# Altium PCB PCB3.PcbDoc
Units mm, origin at the board's own origin, x right, y up, seen from the top; angles counter-clockwise.
Board outline 68.96 x 84.07 mm, 2 copper layers (Top Layer, Bottom Layer); 9 components, 13 nets, 54 pads, 0 vias.
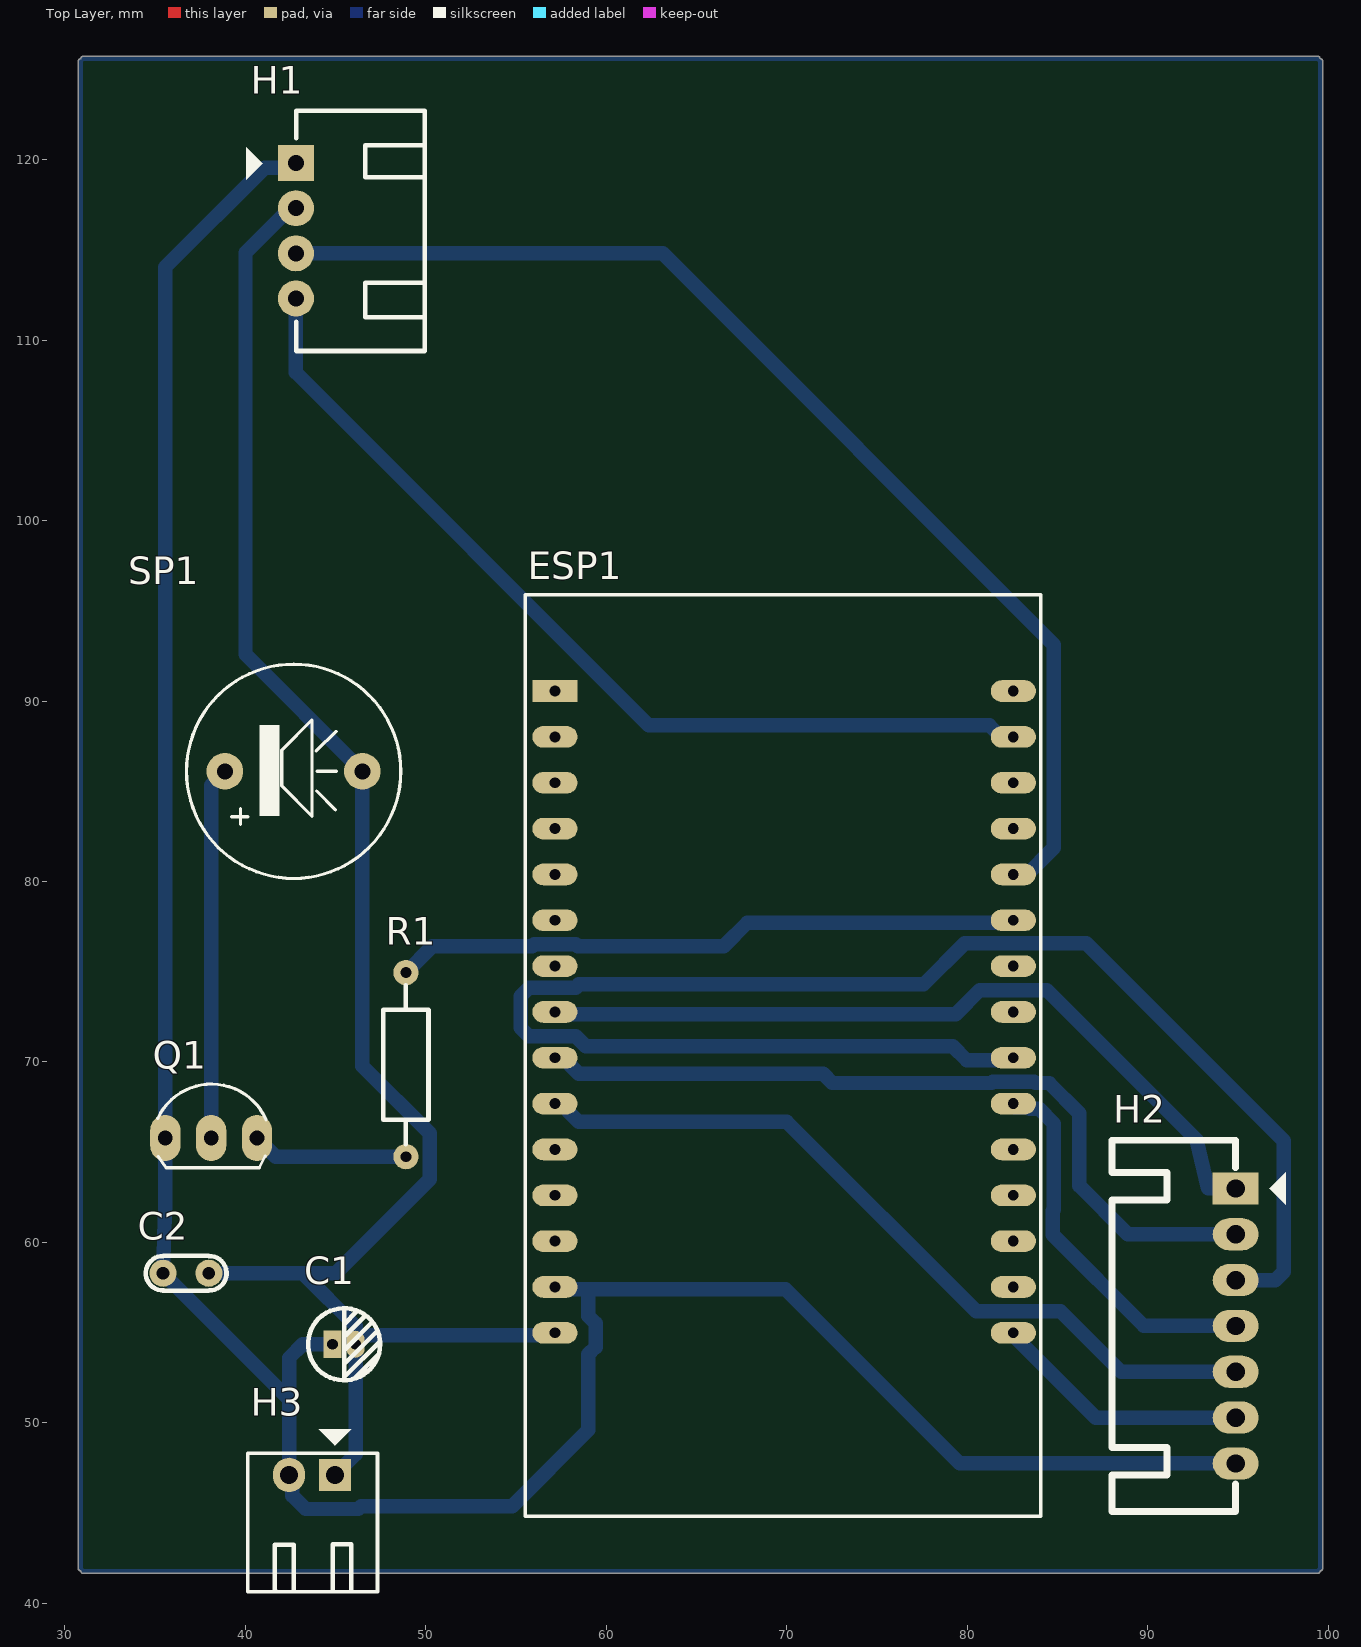
[diagram p0: Top Layer view]
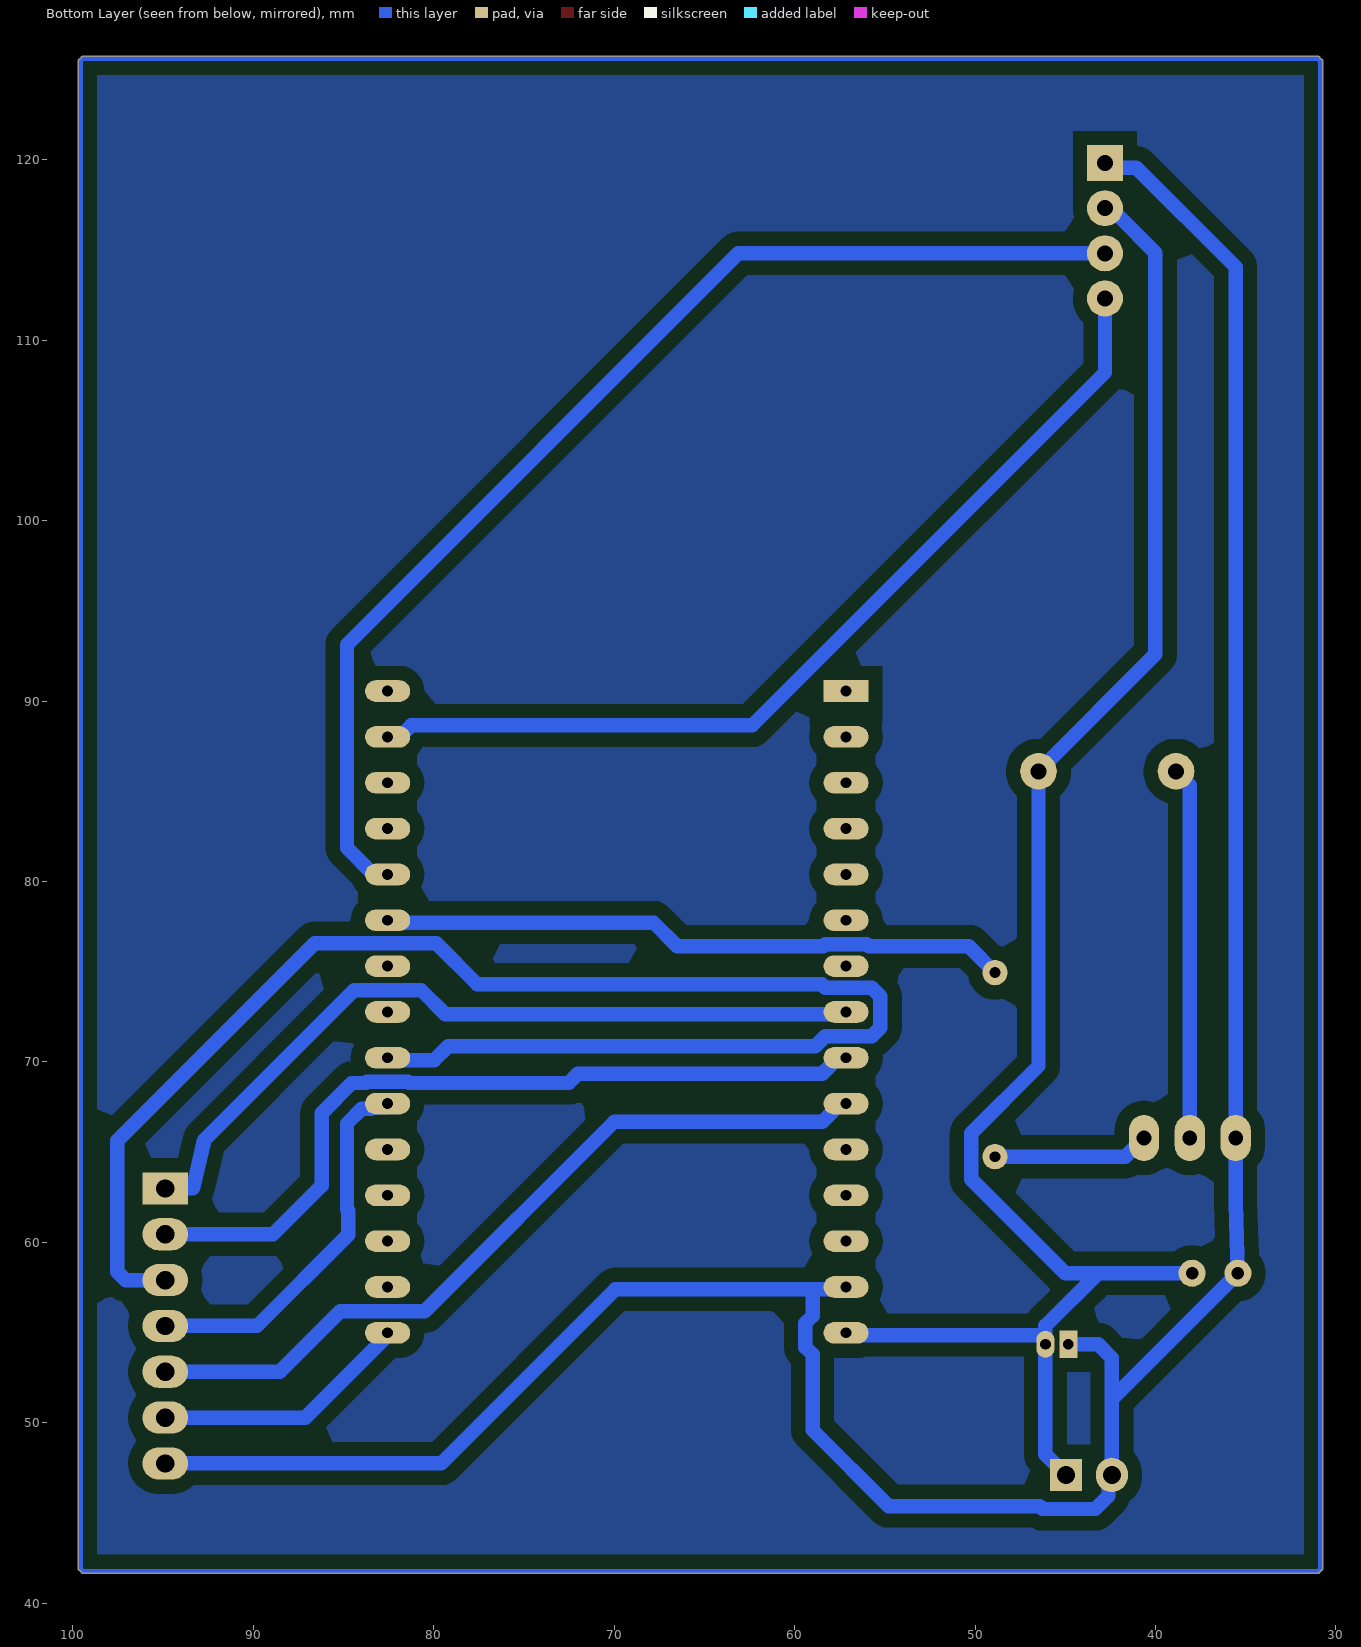
[diagram p1: Bottom Layer view, seen from below]
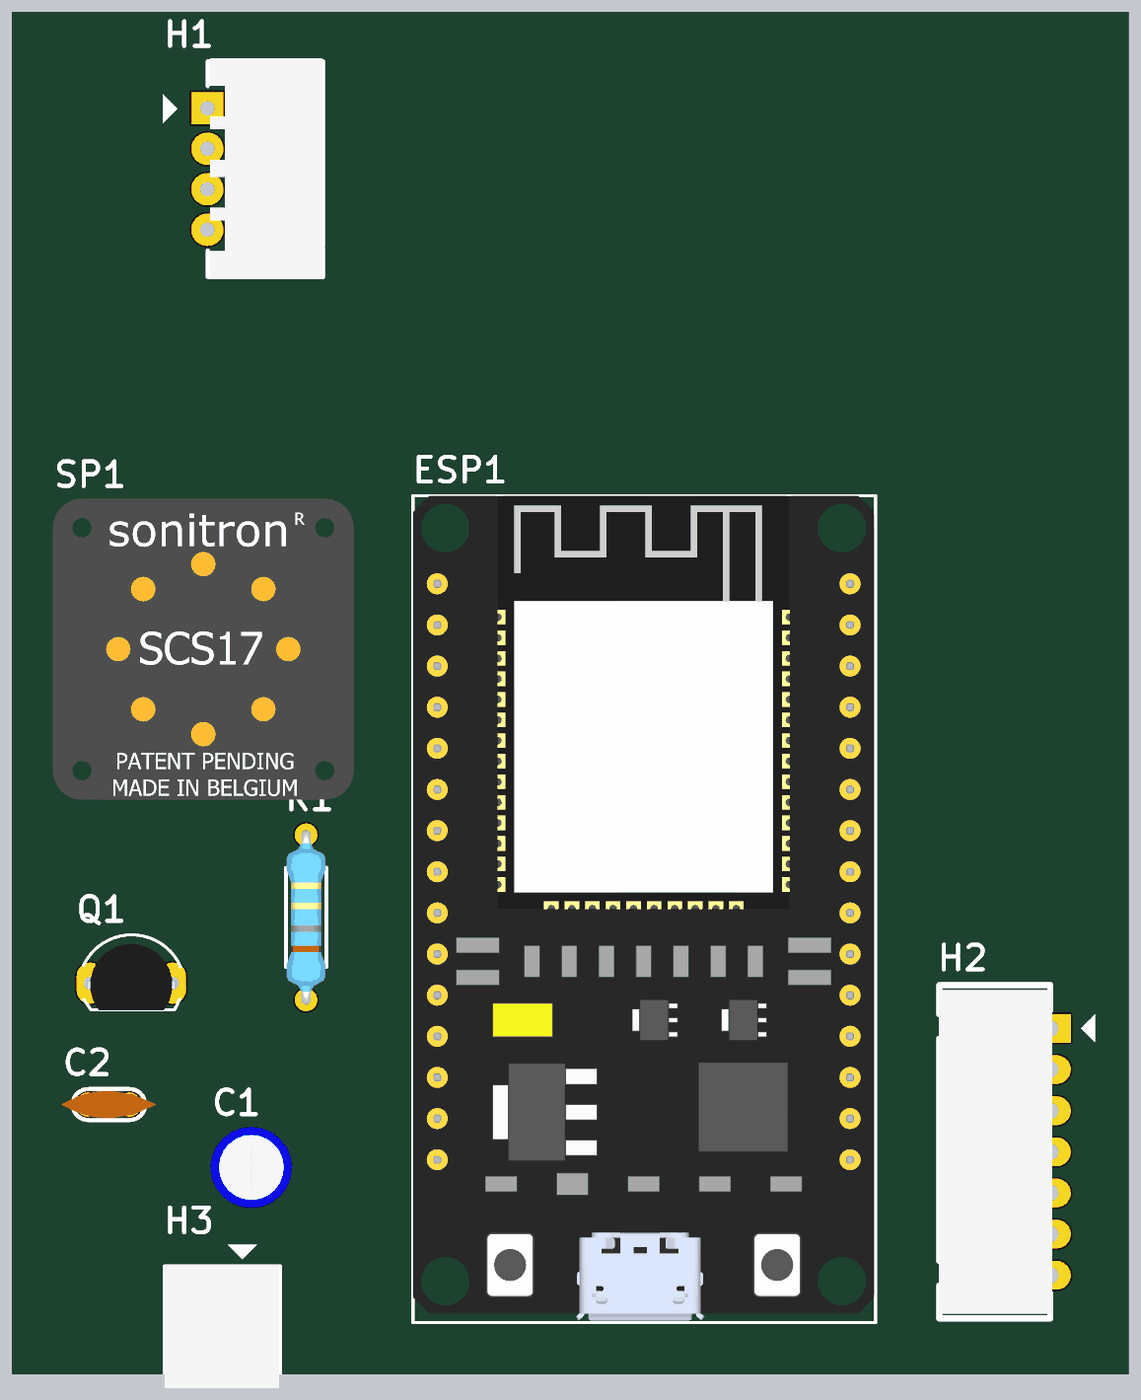
[diagram p2: 3D render of the assembled board from above, using the file's embedded part models]

## Layer stack, top to bottom
Top Solder: solder mask 0.0102, Solder Resist, Dk 3.5
Top Layer: signal copper 0.0356
Dielectric 1: dielectric 0.32, FR-4, Dk 4.8
Bottom Layer: signal copper 0.0356
Bottom Solder: solder mask 0.0102, Solder Resist, Dk 3.5

## Board outline
30.885,41.807 cw(c30.861,41.932) 30.734,41.932 30.734,125.454 cw(c30.861,125.454) 30.885,125.579 cw(c31.01,125.603) 31.01,125.73 99.419,125.73 cw(c99.419,125.603) 99.547,125.603 99.544,125.579 cw(c99.568,125.454) 99.695,125.454 99.695,41.932 cw(c99.568,41.932) 99.544,41.807 99.547,41.783 cw(c99.419,41.783) 99.419,41.656 31.01,41.656 cw(c31.01,41.783)

## Design rules (kind name [scope] priority, off if disabled: settings)
Clearance [All] p1: gap=0.8 ignorepadtopadclearanceinfootprint=FALSE
PolygonConnect [All] p1: connectstyle=Relief reliefconductorwidth=0.254 reliefentries=4 polygonreliefangle="90 Angle" airgapwidth=0.254
RoutingLayers [All] p1: top layer_v5=FALSE bottom layer_v5=TRUE
RoutingVias [All] p1: holewidth=0.711 width=1.27 viastyle="Through Hole" minholewidth=0.711 minwidth=1.27 maxholewidth=0.711 maxwidth=1.27
SolderMaskExpansion [All] p1: expansion=0.102 istentingtop=FALSE
SupplyNets "Schematic Supply Nets_2" [InNet('VCC')] p1: voltage=0.000
SupplyNets "Schematic Supply Nets_1" [InNet('GND')] p2: voltage=0.000
SupplyNets "Schematic Supply Nets" [InNet('+5')] p3: voltage=0.000
Width [All] p1: maxlimit=0.8 minlimit=0.8 preferedwidth=0.8
29 further rules are at their usual default settings.

## Components (designator, comment, footprint, x,y, rotation, side; value= is the part's Value field where it differs from the comment)
C1 "22uF" "tu hoa 4mm" 45.466,54.356 r0 top
C2 "104" "tu gom" 36.703,58.293 r180 top
ESP1 "ESP32 DEVKIT" "ESP32 WROOM 32 KIT" 57.15,90.551 r0 top
H1 "LCD 16x2" "Header 4P DC 2.54" 42.824,119.783 r0 top
H2 "LoRa Module" "Header 7P DC 2.54" 94.869,62.993 r180 top
H3 "Nguồn" "Header 2P DC 2.54" 44.958,47.117 r270 top
Q1 "C1815" TO92 38.1,65.786 r0 top value=C9014
R1 "330R" "tro vach 1/4w" 48.895,69.85 r270 top
SP1 "Speaker" SPK 38.862,86.106 r0 top value="Speaker Chip"

## Footprints (in the part's own frame and the unit in brackets; to place one, negate y for a bottom-side part, rotate by r counter-clockwise, add the part's x,y. Pads: shape width x height; smd on the part's side, far side on the other; paste and mask are expansions set on the pad)
"ESP32 WROOM 32 KIT" [mm]
  rect 2.5x1.2 hole 0.6: 1(0,0)
  oval 2.5x1.2 hole 0.6: 2(0,-2.54) 3(0,-5.08) 4(0,-7.62) 5(0,-10.16) 6(0,-12.7) 7(0,-15.24) 8(0,-17.78) 9(0,-20.32) 10(0,-22.86) 11(0,-25.4) 12(0,-27.94) 13(0,-30.48) 14(0,-33.02) 15(0,-35.56) 16(25.4,-35.56) 17(25.4,-33.02) 18(25.4,-30.48) 19(25.4,-27.94) 20(25.4,-25.4) 21(25.4,-22.86) 22(25.4,-20.32) 23(25.4,-17.78) 24(25.4,-15.24) 25(25.4,-12.7) 26(25.4,-10.16) 27(25.4,-7.62) 28(25.4,-5.08) 29(25.4,-2.54) 30(25.4,0)
  silkscreen extent -1.65,-45.72 26.92,5.33, body extent -1.65,-45.6 26.85,5.33, height 10.49
"Header 2P DC 2.54" [mil]
  rect 70x70 hole 39.37 unplated: 1(0,0)
  oval 75x70 hole 39.37 unplated: 2(0,-100)
  silkscreen extent -100,-190 255,93, body extent -50,-190 250,90, height 237
"Header 4P DC 2.54" [mil]
  rect 78.74x78.74 hole 35: 1(-1,1)
  round 78.74 hole 35: 2(-1,-97.42) 3(-1,-195.85) 4(-1,-294.28)
  silkscreen extent -110,-409 280,115, body extent 5,-413 278,123, height 290
"Header 7P DC 2.54" [mil]
  rect 100x70 hole 40: 1(0,0.04)
  oval 100x70 hole 40: 2(0,100.04) 3(0,200.04) 4(0,300.04) 5(0,400.04) 6(0,500.04) 7(0,600.04)
  silkscreen extent -110,-105 270,705, body extent -5,-94 271,694, height 237
SPK [mil] "Speaker Chip"
  round 80 hole 35: 1(0,0) 2(300,0)
  silkscreen extent -84,-234 384,234, body extent -221,-354 511,378, height 344
TO92 [mil] "TO-92"
  oval 66x100 hole 32: 1(-100,0) 2(0,0) 3(100,0)
  silkscreen extent -117,-65 120,118, body extent -109,-66 109,95, height 245
"tro vach 1/4w" [mm]
  round 1.4 hole 0.6: 1(-5.1,0) 2(5.1,0)
  silkscreen extent -4.39,-1.25 4.42,1.25, body extent -5.38,-1.2 5.38,1.2, height 2.41
"tu gom" [mm] "Tu gom mini"
  round 1.5 hole 0.7: 1(-1.27,0) 2(1.27,0)
  silkscreen extent -2.25,-0.97 2.22,0.97, body extent -2.92,-0.85 2.92,0.85, height 6.12
"tu hoa 4mm" [mm]
  rect 1x1.5 hole 0.6: 1(-0.635,0)
  oval 1x1.5 hole 0.6: 2(0.635,0)
  silkscreen extent -2,-2 2.01,2.01, body extent -2.47,-2.47 2.58,2.58, height 14.81

## Part data
C1: library part "Tu Hoa 22uF 16V 4x7", "Cắm", Chung_Loai=Cắm, Don_Vi=Con, Ma_Hang=MH006857, So_Chan=2, Ten_Linh_Kien="Tụ Hóa 22uF 16V"
C2: library part "Tu gom 104 50V", "Cắm", Chung_Loai=Cắm, Don_Vi=Con, Ma_Hang=MH004761, So_Chan=2, Ten_Linh_Kien="Tụ gốm 104 100nF 50V"
ESP1: library part "ESP32 WROOM 32 KIT"
H1: library part "Header 4P 2.54 Duc Cong", "Cắm", Chung_Loai=Cắm, Don_Vi=Con, Ma_Hang=MH001310, Ten_Linh_Kien="Header 4P XH2.54-4P Đực Cong"
H2: library part "Header 7P 2.54 Duc Cong", "Cắm", Chung_Loai=Cắm, Don_Vi=Con, Ma_Hang=MH004118, Ten_Linh_Kien="Header 7P XH2.54-7P Đực Cong"
H3: library part "Header 2P 2.54 Duc Cong", "Cắm", Chung_Loai=Cắm, Don_Vi=Con, Ma_Hang=MH002852, Ten_Linh_Kien="Header 2P XH2.54-2P Đực Cong"
Q1: library part "Trans C1815 DIP", "NPN transistor"
R1: library part "Tro Vach 1/4W 1% 330R", "Cắm", Chung_Loai=Cắm, Don_Vi=Con, Ma_Hang=MH006348, So_Chan=2, Ten_Linh_Kien="Trở Vạch 1/4w 1% 330R"
SP1: library part SPK, "Speaker Chip"

## Nets (pads, with @x,y where several pads share a name; then routed paths per layer and width w, separated by ;. In a path a pad name is that pad's centre, name@x,y a point inside that pad or via, vN(x,y) a via of type N, cw(c..) or ccw(c..) an arc to the next point about the centre after c; other vN are vias at no path point)
+5: C1.2 C2.1 ESP1.15 H1.2 H3.1 SP1.2 | length 97.7
  Bottom Layer w0.8: C2.1 43.18,58.293 ; H1.2 42.474,117.308 41.974,116.808 41.971,116.808 40.005,114.842 40.005,92.583 SP1.2 46.482,69.774 50.216,66.04 50.216,63.5 45.009,58.293 43.18,58.293 ; H3.1 46.101,48.26 C1.2 C1.2@46.101,54.864 ; ESP1.15@57.15,54.864 C1.2@46.101,54.864 ; 43.18,58.293 46.101,55.372 C1.2@46.101,54.864
BUZZER_CTRL: ESP1.25 R1.1 | length 34.9
  Bottom Layer w0.8: R1.1 50.348,76.403 55.895,76.403 56.003,76.511 58.297,76.511 58.405,76.403 66.497,76.403 67.818,77.724 ESP1.25@82.55,77.724
GND: C1.1 C2.2 ESP1.14 H1.1 H2.7 H3.2 Q1.1 | length 154.1
  Bottom Layer w0.8: H1.1 42.545,119.554 41.068,119.554 35.56,114.046 Q1.1 35.56,62.179 C2.2 42.418,51.308 ; C1.1 43.18,54.356 42.418,53.594 42.418,51.308 ; ESP1.14@57.15,57.404 59.004,57.404 ; H2.7 79.578,47.752 69.926,57.404 59.004,57.404 ; 42.418,51.308 H3.2 42.605,46.93 42.605,45.965 43.342,45.228 46.261,45.228 46.423,45.39 54.788,45.39 59.004,49.606 59.004,53.805 59.4,54.201 59.4,55.527 59.004,55.923 59.004,57.404
LORA_AUX: ESP1.10 H2.5 | length 44
  Bottom Layer w0.8: ESP1.10 57.692,67.691 57.877,67.506 57.877,67.267 58.469,66.675 70.002,66.675 80.493,56.185 81.397,56.185 81.403,56.191 83.697,56.191 83.703,56.185 85.166,56.185 88.519,52.832 H2.5
LORA_M0: ESP1.8 H2.1 | length 43.8
  Bottom Layer w0.8: ESP1.8@57.15,72.644 79.36,72.644 80.7,73.984 84.4,73.984 92.71,65.674 93.345,62.992 H2.1
LORA_M1: ESP1.9 H2.2 | length 44.2
  Bottom Layer w0.8: ESP1.9 57.692,70.231 58,69.923 58,69.811 58.469,69.342 72.009,69.342 72.517,68.834 81.346,68.834 81.403,68.891 83.697,68.891 83.754,68.834 84.531,68.834 86.2,67.165 86.2,63.152 88.9,60.452 H2.2
LORA_RX: ESP1.22 H2.3 | length 87.9
  Bottom Layer w0.8: ESP1.22@82.55,70.104 79.959,70.104 79.197,70.866 58.862,70.866 58.297,71.431 55.714,71.431 55.245,71.9 55.245,73.642 55.714,74.111 58.297,74.111 58.481,74.295 77.572,74.295 79.858,76.581 86.589,76.581 97.536,65.634 97.536,58.381 97.067,57.912 H2.3
LORA_TX: ESP1.21 H2.4 | length 21.1
  Bottom Layer w0.8: ESP1.21@82.55,67.564 82.627,67.487 83.385,67.487 83.47,67.402 83.983,67.402 84.8,66.585 84.8,61.821 84.734,61.756 84.734,60.427 89.789,55.372 H2.4
NetQ1_2: Q1.2 SP1.1 | length 20.6
  Bottom Layer w0.8: Q1.2 38.1,85.344 SP1.1
NetQ1_3: Q1.3 R1.2 | length 8.7
  Bottom Layer w0.8: Q1.3 41.676,64.75 R1.2
OLED_SCL: ESP1.29 H1.4 | length 52.2
  Bottom Layer w0.8: H1.4 42.799,108.204 62.357,88.646 81.231,88.646 81.866,88.011 ESP1.29
OLED_SDA: ESP1.26 H1.3 | length 65.2
  Bottom Layer w0.8: H1.3 63.119,114.808 84.8,93.127 84.8,81.864 83.2,80.264 ESP1.26@82.55,80.264
VCC: ESP1.16 H2.6 | length 14.2
  Bottom Layer w0.8: ESP1.16@82.55,54.864 87.122,50.292 H2.6
pads on no net: ESP1.1 ESP1.2 ESP1.3 ESP1.4 ESP1.5 ESP1.6 ESP1.7 ESP1.11 ESP1.12 ESP1.13 ESP1.17 ESP1.18 ESP1.19 ESP1.20 ESP1.23 ESP1.24 ESP1.27 ESP1.28 ESP1.30
copper on no net: | length 304.7
  Bottom Layer w0.254: 30.861,41.932 31.01,41.783 99.419,41.783 99.568,41.932 99.568,125.454 99.419,125.603 31.01,125.603 30.861,125.454 30.861,41.932

## Polygon pours and split planes (outlines as drawn)
no net on Bottom Layer "NONET_L02_P000" (solid, pour order 0): 30.872,125.592 30.935,125.529 99.695,125.529 99.695,41.656 30.872,41.656